# Altium PCB BSPD_PCB.PcbDoc
Units mil, origin at the board's own origin, x right, y up, seen from the top; angles counter-clockwise.
Board outline 2163.98 x 1652.88 mil, 2 copper layers (Top Layer, Bottom Layer); 45 components, 32 nets, 147 pads, 82 vias.
Unrouted connection lines stored in the file: 4.
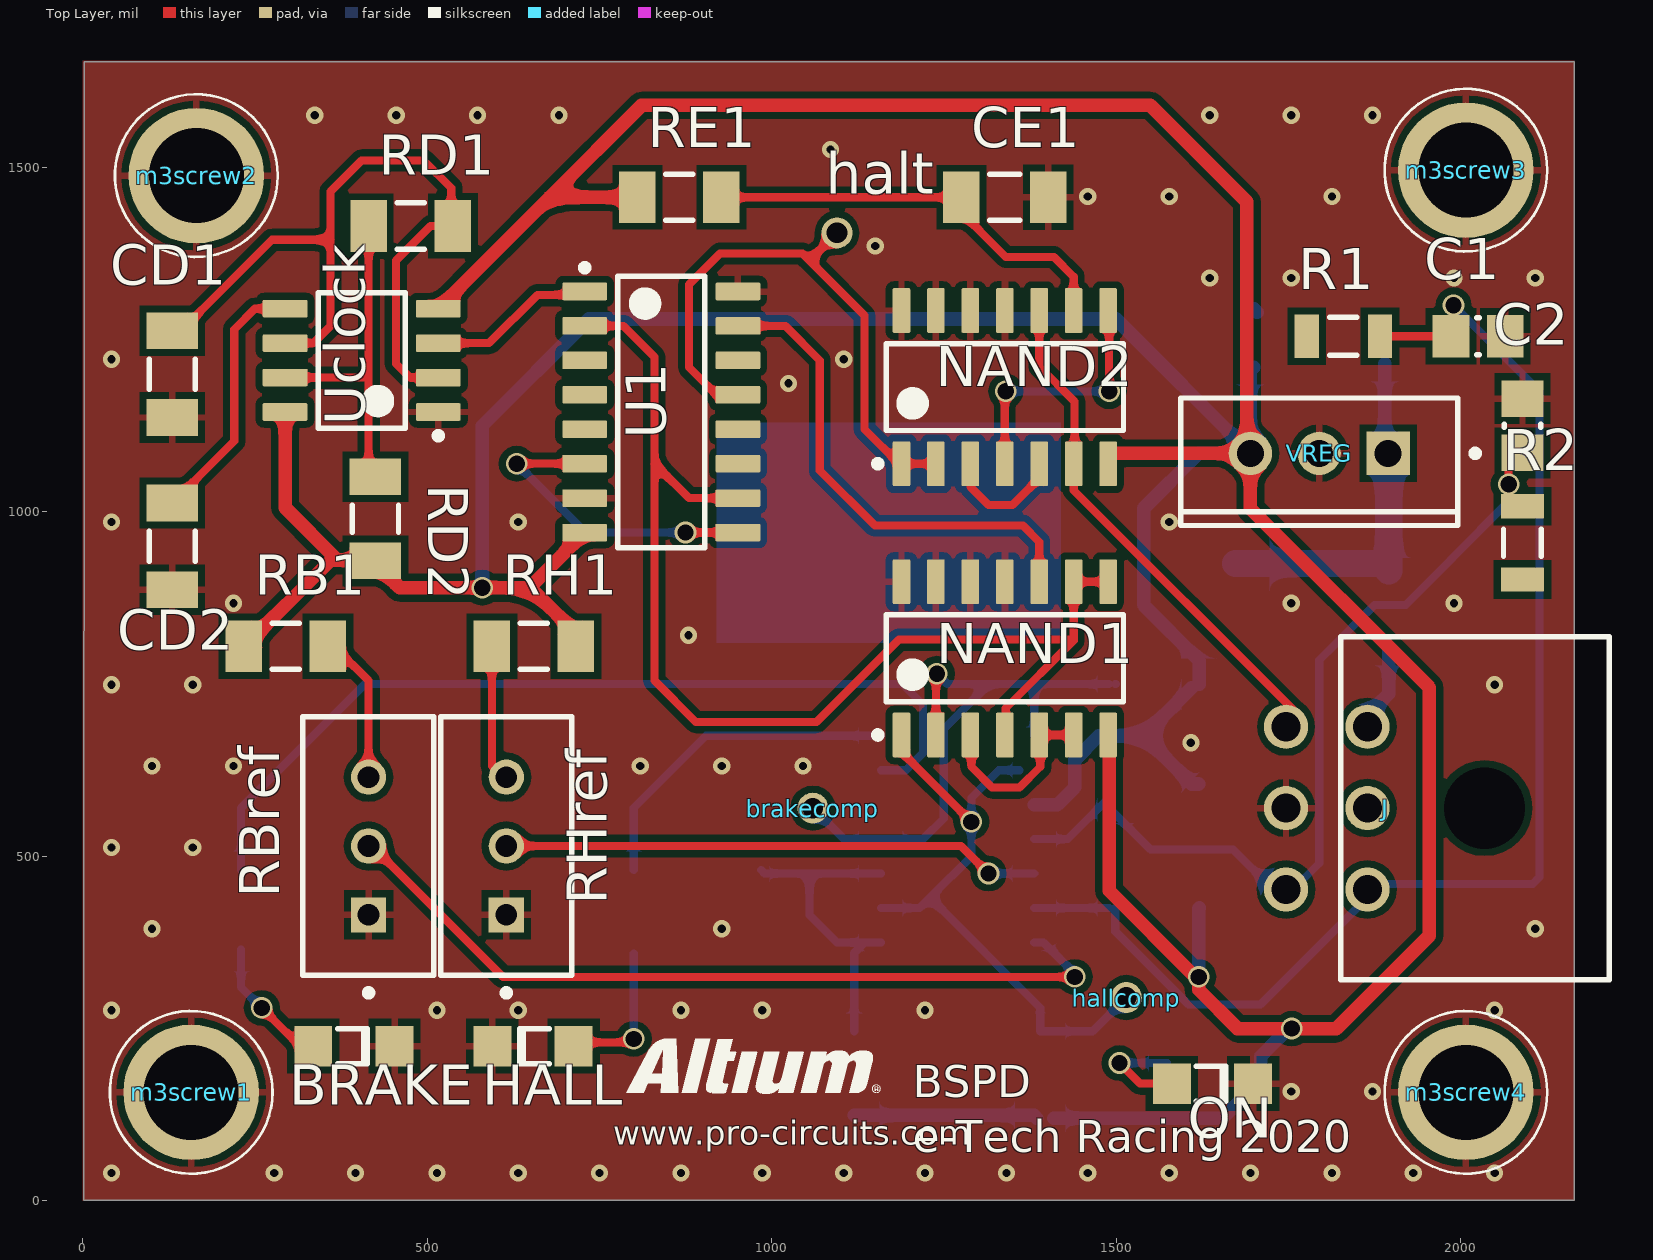
[diagram p0: Top Layer view]
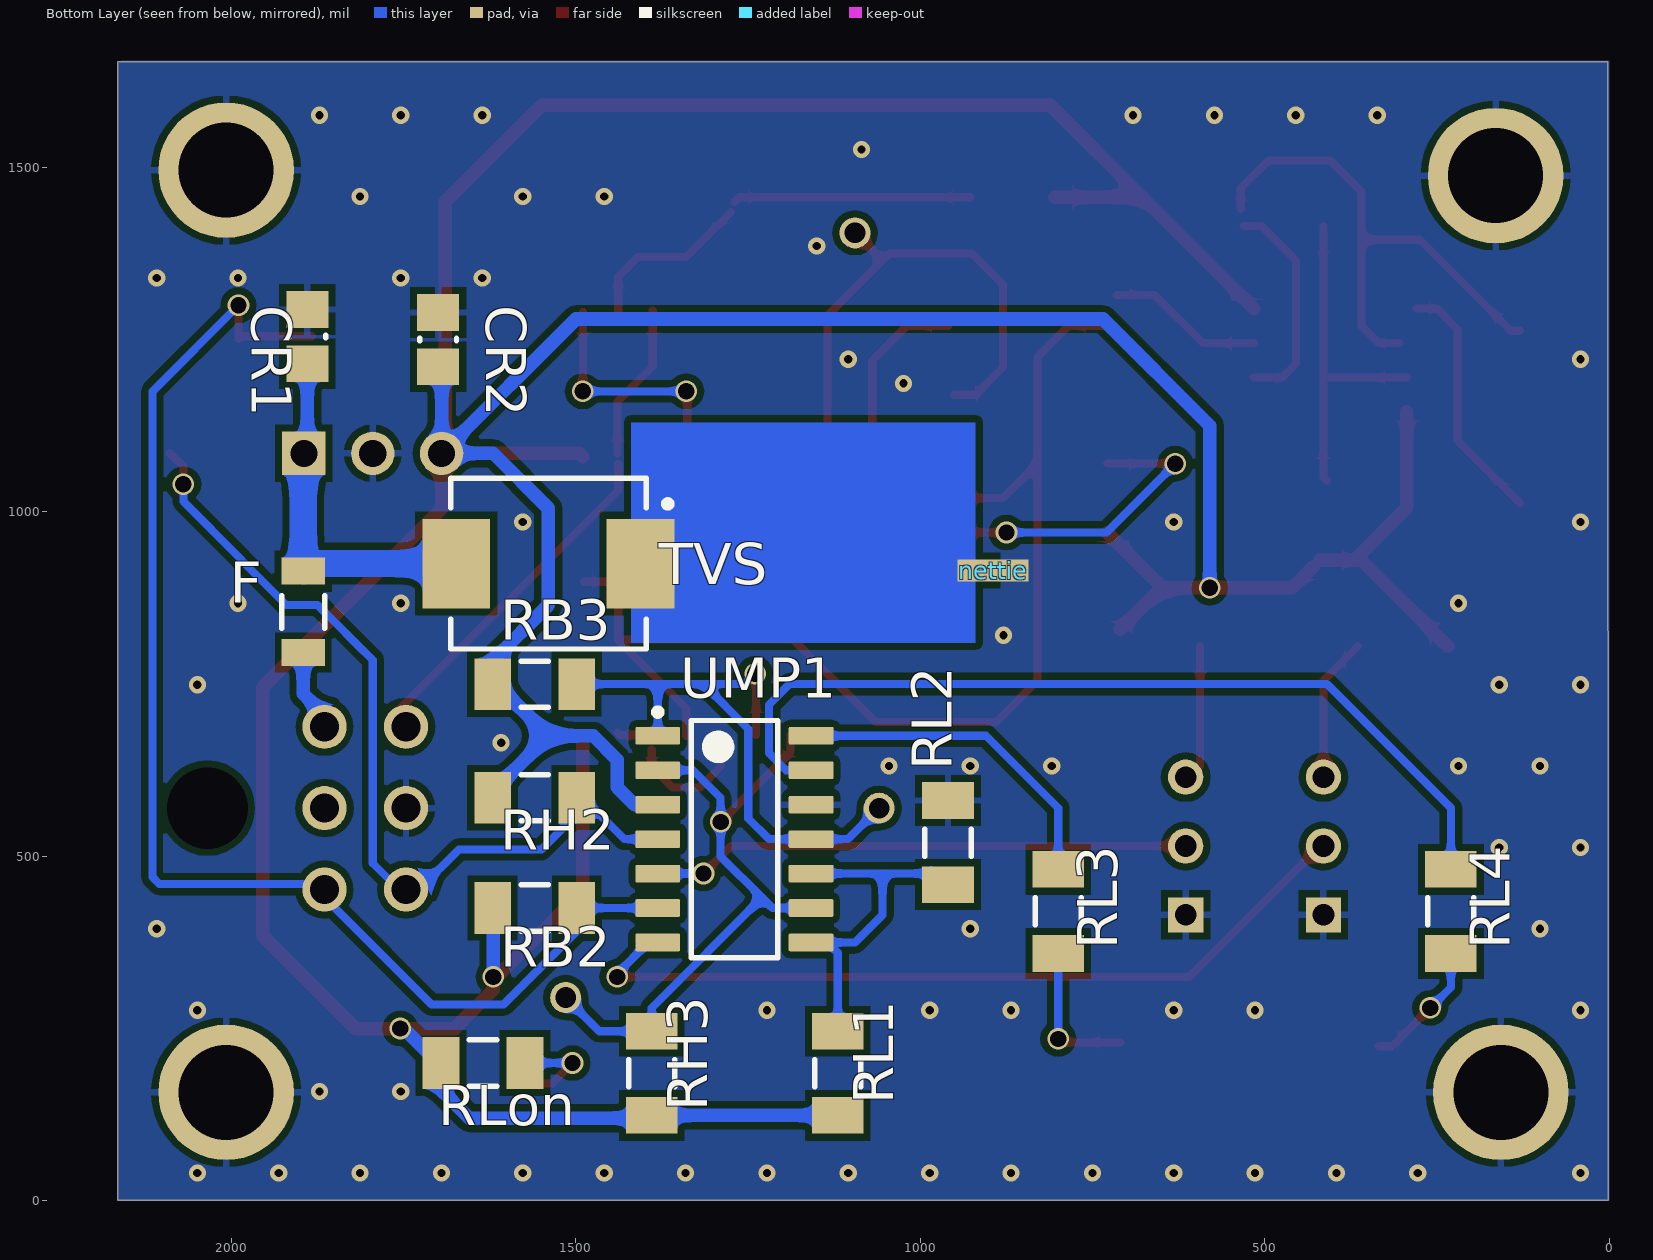
[diagram p1: Bottom Layer view, seen from below]

## Layer stack, top to bottom
Top Solder: solder mask 0.4, Solder Resist, Dk 3.5
Top Layer: signal copper 1.4
Dielectric 1: dielectric 12.6, FR-4, Dk 4.8
Bottom Layer: signal copper 1.4
Bottom Solder: solder mask 0.4, Solder Resist, Dk 3.5

## Board outline
1.38,0.66 2165.35,0.66 2165.35,1653.54 2.64,1653.54

## Design rules (kind name [scope] priority, off if disabled: settings)
Clearance [All] p1: gap=10 ignorepadtopadclearanceinfootprint=FALSE except(0: Arc-Hole Track-Hole SMDPad-Hole THPad-Hole Via-Hole Fill-Hole Poly-Hole Region-Hole Text-Hole)
HoleSize [All] p1: absolutevalues=TRUE maxlimit=393.7 minlimit=1 maxpercent=80.000 minpercent=20.000
PolygonConnect "Net ties" [All vs InComponent('nettie')] p1: connectstyle=Direct reliefconductorwidth=10 reliefentries=4 polygonreliefangle="90 Angle" airgapwidth=10
PolygonConnect Stitchings [All vs InNamedUnion('Via Stitchings')] p2: connectstyle=Direct reliefconductorwidth=10 reliefentries=4 polygonreliefangle="90 Angle" airgapwidth=10
PolygonConnect pads [All vs isPad] p3: connectstyle=Relief reliefconductorwidth=10 reliefentries=4 polygonreliefangle="90 Angle" airgapwidth=10
RoutingVias [All] p1: holewidth=23.62 width=31.5 viastyle="Through Hole" minholewidth=23.62 minwidth=31.5 maxholewidth=23.62 maxwidth=31.5
SolderMaskExpansion [All] p1: expansion=4 istentingtop=FALSE
Width Width_power [InNetClass('power')] p1: maxlimit=39.37 minlimit=19.68 preferedwidth=19.68
Width Width_GND [InNetClass('gnd')] p2: maxlimit=39.37 minlimit=11.81 preferedwidth=19.68
Width [All] p3: maxlimit=39.37 minlimit=11.81 preferedwidth=11.81
29 further rules are at their usual default settings.

## Classes and differential pairs
component class Timing: CD1 CD2 NAND1 RD1 RD2 U1 Uclock
component class BSPD_Main: brakecomp C1 C2 CR1 CR2 F hallcomp halt J m3screw1 m3screw2 m3screw3 m3screw4 nettie ON R1 R2 RLon TVS VREG
component class Latching: CE1 NAND2 RE1
net class power: +12 GND LVBat NetCR1_2
component class Input: BRAKE HALL RB1 RB2 RB3 RBref RH1 RH2 RH3 RHref RL1 RL2 RL3 RL4 UMP1

## Components (designator, comment, footprint, x,y, rotation, side; value= is the part's Value field where it differs from the comment)
BRAKE "150120BS75000" 1206_A 393.74,224.37 r180 top
brakecomp "testpoint" testpoint 1060,570 r90 top
C1 "100nF" CAPC0805(2012)145_M 2025.63,1255 r0 top
C2 "100nF" CAPC0805(2012)145_M 2090,1125 r270 top
CD1 "CAP 68nF" CAPC1206(3216)100_M 130,1200 r270 top value=68nF
CD2 "CAP 10nF" CAPC1206(3216)110_M 130,950 r270 top value=2.7uF
CE1 "CAP 1uF" CAPC1206(3216)190_M 1338.58,1456.69 r180 top value=1uF
CR1 "CAP 470nF" CAPC0805(2012)110_M 1890,1254.37 r270 bottom value=470nF
CR2 "CAP 100nF" CAPC0805(2012)145_M 1700,1250 r270 bottom value=100nF
F "NANOSMDC012F-2" TECO-NANOSMDC012F_V 1896,855 r90 bottom
HALL "150120BS75000" 1206_A 653.74,224.37 r0 top
hallcomp "testpoint" testpoint 1515,295 r90 top
halt "testpoint" testpoint 1095,1405 r90 top
J "Molex Micro-Fit 3x2 Right Angle" "Molex Micro-fit 3x2 Right angle" 1935.24,667.95 r90 top
m3screw1 "m3 screw" "M3 screw" 157.48,157.48 r90 top
m3screw2 "m3 screw" "M3 screw" 165,1488.15 r90 top
m3screw3 "m3 screw" "M3 screw" 2007.87,1496.06 r90 top
m3screw4 "m3 screw" "M3 screw" 2007.87,157.48 r90 top
NAND1 "CD4011BM" D0014A_M 1338.58,787.4 r90 top
NAND2 "CD4011BM" D0014A_M 1338.58,1181.1 r90 top
nettie "NETTIE" NETTIE-SMT2-W0.8L2.0(MM) 884.92,914.76 r180 bottom net-tie
ON "150120RS75000" 1206_A 1640,170 r180 top
R1 "30k" RESC3216X60X45LL10T20 1830,1255 r0 top
R2 "30k" RESC3216X60X45LL10T20 2090,955 r90 top
RB1 "1K1" RESC1206(3216)_M 295,805 r180 top value="1100.00 Ohm"
RB2 "10K" RESC1206(3216)_M 1560,425 r0 bottom value="10000.00 Ohm"
RB3 "10K" RESC1206(3216)_M 1560,750 r0 bottom value="10000.00 Ohm"
RBref "POT Bourns 3296W 10K" "POT Bourns 3296W" 440,525 r90 top
RD1 "68K" RESC1206(3216)_M 476.18,1415 r180 top value="68000.00 Ohm"
RD2 "1K1" RESC1206(3216)_M 425,990 r270 top value="1100.00 Ohm"
RE1 "10K" RESC1206(3216)_M 866.14,1456.69 r180 top value="10000.00 Ohm"
RH1 "68K" RESC1206(3216)_M 655,805 r0 top value="68000.00 Ohm"
RH2 "10K" RESC1206(3216)_M 1560,585 r0 bottom value="10000.00 Ohm"
RH3 "10K" RESC1206(3216)_M 1390,185 r270 bottom value="10000.00 Ohm"
RHref "POT Bourns 3296W 100K" "POT Bourns 3296W" 640,525 r90 top
RL1 "10K" RESC1206(3216)_M 1120,185 r270 bottom value="10000.00 Ohm"
RL2 "10K" RESC1206(3216)_M 960,520 r270 bottom value="10000.00 Ohm"
RL3 "1K1" RESC1206(3216)_M 800,420 r270 bottom value="1100.00 Ohm"
RL4 "1K1" RESC1206(3216)_M 230,420 r270 bottom value="1100.00 Ohm"
RLon "1K1" RESC1206(3216)_M 1635,200 r0 bottom value="1100.00 Ohm"
TVS "TVS 40V" "TVS  DO-214AB" 1540,925 r180 bottom (schematic designator tvs)
U1 "CD4520BM" D0016A_M 840,1145 r0 top
Uclock "LMC555CM/NOPB" D0008A_M 405,1220 r180 top
UMP1 "LM339M" D0014A_M 1270,525 r180 bottom
VREG "LM7812" FAIR-TO-220-3 1795,1085 r270 top

## Footprints (in the part's own frame and the unit in brackets; to place one, negate y for a bottom-side part, rotate by r counter-clockwise, add the part's x,y. Pads: shape width x height; smd on the part's side, far side on the other; paste and mask are expansions set on the pad)
1206_A [mm] "Chip LED, 2-Leads, Body 3.2x1.6mm, IPC Medium Density"
  rect 1.4x1.5 smd: 1(-1.5,0) 2(1.5,0)
  silkscreen extent -0.5,-0.67 0.6,0.65, body extent -1.6,-0.8 1.6,0.8, height 0.68
CAPC0805(2012)110_M [mm] "Chip Capacitor, Body 2.0x1.2mm, Height 1.1mm, IPC Low Density"
  rect 1.35x1.55 smd: 1(-1,0) 2(1,0)
  silkscreen extent -0.05,-0.67 0.05,0.67, body extent -1.1,-0.72 1.1,0.72, height 1.1
CAPC0805(2012)145_M [mm] "Chip Capacitor, Body 2.0x1.2mm, Height 1.45mm, IPC Low Density"
  rect 1.35x1.55 smd: 1(-1,0) 2(1,0)
  silkscreen extent -0.05,-0.67 0.05,0.67, body extent -1.1,-0.72 1.1,0.72, height 1.45
CAPC1206(3216)100_M [mm] "Chip Capacitor, Body 3.2x1.6mm, Height 1mm, IPC Low Density"
  rect 1.35x1.9 smd: 1(-1.6,0) 2(1.6,0)
  silkscreen extent -0.55,-0.85 0.55,0.85, body extent -1.7,-0.9 1.7,0.9, height 1
CAPC1206(3216)110_M [mm] "Chip Capacitor, Body 3.2x1.6mm, Height 1.1mm, IPC Low Density"
  rect 1.35x1.9 smd: 1(-1.6,0) 2(1.6,0)
  silkscreen extent -0.55,-0.85 0.55,0.85, body extent -1.7,-0.9 1.7,0.9, height 1.1
CAPC1206(3216)190_M [mm] "Chip Capacitor, Body 3.2x1.6mm, Height 1.9mm, IPC Low Density"
  rect 1.35x1.9 smd: 1(-1.6,0) 2(1.6,0)
  silkscreen extent -0.55,-0.85 0.55,0.85, body extent -1.7,-0.9 1.7,0.9, height 1.9
D0008A_M [mm] "SOIC, 8-Leads, Body 5x4mm, Pitch 1.27mm, IPC Low Density"
  rrect15% 1.65x0.65 smd: 1(-2.825,1.905) 2(-2.825,0.635) 3(-2.825,-0.635) 4(-2.825,-1.905) 5(2.825,-1.905) 6(2.825,-0.635) 7(2.825,0.635) 8(2.825,1.905)
  silkscreen extent -2.95,-2.5 1.6,2.9, body extent -3,-2.45 3,2.45, height 1.63
D0014A_M [mm] "SOIC, 14-Leads, Body 8.75x4mm, Pitch 1.27mm, IPC Low Density"
  rrect15% 1.65x0.65 smd: 1(-2.825,3.81) 2(-2.825,2.54) 3(-2.825,1.27) 4(-2.825,0) 5(-2.825,-1.27) 6(-2.825,-2.54) 7(-2.825,-3.81) 8(2.825,-3.81) 9(2.825,-2.54) 10(2.825,-1.27) 11(2.825,0) 12(2.825,1.27) 13(2.825,2.54) 14(2.825,3.81)
  silkscreen extent -2.95,-4.38 1.6,4.81, body extent -3.02,-4.32 3.02,4.32, height 1.59
D0016A_M [mm] "SOIC, 16-Leads, Body 10x4mm, Pitch 1.27mm, IPC Low Density"
  rrect15% 1.65x0.65 smd: 1(-2.825,4.445) 2(-2.825,3.175) 3(-2.825,1.905) 4(-2.825,0.635) 5(-2.825,-0.635) 6(-2.825,-1.905) 7(-2.825,-3.175) 8(-2.825,-4.445) 9(2.825,-4.445) 10(2.825,-3.175) 11(2.825,-1.905) 12(2.825,-0.635) 13(2.825,0.635) 14(2.825,1.905) 15(2.825,3.175) 16(2.825,4.445)
  silkscreen extent -2.95,-5 1.6,5.44, body extent -3,-4.95 3,4.95, height 1.59
FAIR-TO-220-3 [mm] "FM, 3-Leads, Body 10.2x4.7mm, Pitch 2.54mm"
  rect 1.6x1.6 hole 1: 1(0,2.54)
  round 1.6 hole 1: 2(0,0) 3(0,-2.54)
  silkscreen extent -2.04,-5.1 2.66,5.88, body extent -2.04,-5.1 2.66,5.1, height 18.95
"M3 screw" [mm]
  round 5 hole 3.5: pad(0,0)
  silkscreen extent -3,-3 3,3, body extent -2.75,-2.71 2.75,2.79, height 3
"Molex Micro-fit 3x2 Right angle" [mm]
  round 1.63 hole 1.07: 1(0.512,1.786) 2(-2.488,1.786) 3(-5.488,1.786) 4(0.512,4.786) 5(-2.488,4.786) 6(-5.488,4.786)
  round 0 hole 3: 7(-2.488,-2.534)
  silkscreen extent -8.81,-7.13 3.84,2.78, body extent -9.07,-7.12 4.08,5.12, height 8.78
NETTIE-SMT2-W0.8L2.0(MM) [mil] "Net-Tie, Surface Mount, 2.0mm x 0.8mm, 2 Pads(1.2mm x 0.8mm)"
  rect 52x31.5 smd paste-52 mask-19.68: 1(-35.08,0.24) 2(16.1,0.24)
"POT Bourns 3296W" [mm]
  rect 1.3x1.3 hole 0.8: 1(-2.794,0.635)
  round 1.3 hole 0.8: 2(-0.254,0.635) 3(2.286,0.635)
  silkscreen extent -5.79,-1.77 4.51,3.06, body extent -5.02,-1.77 4.51,3.06, height 11.55
RESC1206(3216)_M [mm] "Chip Resistor, Body 3.2x1.6mm, IPC Low Density"
  rect 1.35x1.9 smd: 1(-1.55,0) 2(1.55,0)
  silkscreen extent -0.5,-0.85 0.5,0.85, body extent -1.67,-0.87 1.67,0.87, height 0.75
RESC3216X60X45LL10T20 [mm] "Chip Resistor, 2-Leads, Body 3.20x1.60mm, IPC High Density"
  rect 0.9x1.6 smd: 1(-1.35,0) 2(1.35,0)
  silkscreen extent -0.5,-0.7 0.5,0.7, body extent -1.65,-0.85 1.65,0.85, height 0.6
TECO-NANOSMDC012F_V [mm] "SMD, 2-Leads, Body 3.2x1.585mm"
  rect 1x1.6 smd: 1(-1.5,0) 2(1.5,0)
  silkscreen extent -0.6,-0.79 0.6,0.79, body extent -1.6,-0.79 1.6,0.79, height 1
testpoint [mil]
  round 45 hole 30: 1(0,0)
"TVS  DO-214AB" [mm] "Molded Diode, 2-Leads, Body 7.11x6.22mm"
  rect 2.5x3.3 smd: 1(-3.4,0) 2(3.4,0)
  silkscreen extent -3.6,-3.15 4.52,3.15, body extent -3.77,-3.11 3.77,3.11, height 2.5

## Part data
BRAKE: library part CMP-1426-00014-1, "SMD mono-color Chip LED, WL-SMCW, Green", Color=Green, Manufacturer="Wuerth Elektronik", PartNumber=150120GS75000, ComponentLink1Description="Manufacturer URL", ComponentLink1URL=http://www.we-online.com, ComponentLink2Description=Datasheet, ComponentLink2URL=http://katalog.we-online.com/led/datasheet/150120GS75000.pdf, PackageReference=1206_A
C1 C2 CR2: library part CMP-1036-04417-1, "CAP 100nF 50V ±5% 0805 (2012 Metric) Thickness 1.45mm SMD", Case-EIA=0805, Case-Metric=2012, Rated Voltage="50 V", Tolerance=Â±5%, Max Thickness="1.45 mm", Technology=SMT
CD1: library part CMP-1037-04097-1, "CAP 68nF 50V -20% to +80% 1206 (3216 Metric) Thickness 1mm SMD", Case-EIA=1206, Case-Metric=3216, Rated Voltage="50 V", Tolerance="-20% to +80%", Max Thickness="1 mm", Technology=SMT
CD2: library part CMP-1037-04841-1, "CAP 2.7uF 10V ±10% 1206 (3216 Metric) Thickness 1.05mm SMD", Case-EIA=1206, Case-Metric=3216, Rated Voltage="10 V", Tolerance=Â±10%, Max Thickness="1.05 mm", Technology=SMT
CE1: library part CMP-1037-04720-1, "CAP 1uF 50V ±10% 1206 (3216 Metric) Thickness 1.9mm SMD", Case-EIA=1206, Case-Metric=3216, Rated Voltage="50 V", Tolerance=Â±10%, Max Thickness="1.9 mm", Technology=SMT
CR1: library part CMP-1036-04655-1, "CAP 470nF 50V ±20% 0805 (2012 Metric) Thickness 1.1mm SMD", Case-EIA=0805, Case-Metric=2012, Rated Voltage="50 V", Tolerance=Â±20%, Max Thickness="1.1 mm", Technology=SMT
F: library part CMP-2000-06803-1, "PolySwitch Resettable Device, 0.12 A, 48 V, -40 to 85 degC, 2-Pin SMD, RoHS, Tape and Reel", Hold Current=0.12A, Manufacturer=TEConnectivity/CircuitProtection, Maximum Current Rating=10A, Maximum Initial Resistance=N/A, Maximum Post Trip Resistance=6.5Ohm, Maximum Voltage Rating=48VDC, Minimum Initial Resistance=1.4Ohm, Operating Temperature=-40to85C, Package/Case=1206, Package Description="2-Pin Surface Mount Device, Body 3.2 x 1.585 mm", Package Reference=NANOSMDC012F, Trip Current=0.39A, Typical Power Dissipation=0.5(Max)W, Agency Approvals=CSA/TUV/UL, Applications=N/A, Datasheet URL=http://www.te.com/commerce/DocumentDelivery/DDEController?Action=srchrtrv&DocNm=CLP00010&DocType=CS&DocLang=English, Datasheet Version=11/2013, Dimension=3.4(Max)x1.8(Max)x1(Max)mm, Family=nanoSMD, Lead Diameter=N/R, Manufacturer URL=http://www.te.com/, Maximum Trip Time=0.2@1As, Mounting=SurfaceMount, Mounting Technology=SurfaceMount, Number of Terminals=2, Packaging=TapeandReel, Part No=NANOSMDC012F-2, RoHS=Yes, Seated Plane Height=N/R, Terminal Pitch=N/R, Wire Form=N/R
HALL: library part CMP-1426-00013-1, "SMD mono-color Chip LED, WL-SMCW, Red", Color=Red, Manufacturer="Wuerth Elektronik", PartNumber=150120RS75000, ComponentLink1Description="Manufacturer URL", ComponentLink1URL=http://www.we-online.com, ComponentLink2Description=Datasheet, ComponentLink2URL=http://katalog.we-online.com/led/datasheet/150120RS75000.pdf, PackageReference=1206_A
J: "43045-0600", ComponentLink1Description=Molex, ComponentLink1URL=https://www.molex.com/molex/products/datasheet.jsp?part=active/0430450600_PCB_HEADERS.xml, ComponentLink2Description=Datasheet, ComponentLink2URL=https://www.molex.com/pdm_docs/sd/430450600_sd.pdf
NAND1: library part CMP-1627-00066-2, "CMOS Quad 2-Input NAND Gate, D0014A, TUBE", F @ Nom Voltage(Max)(Mhz)=8, Generic Part Number=CD4011B, ICC @ Nom Voltage(Max)(mA)=0.015, Manufacturer="Texas Instruments", Operating Temperature Range(C)="-55 to 125", Rating=Military, Voltage(Nom)(V)=10, Bits(#)=4, Code_JEDEC=MS-012, DatasheetVersion=SCHS021D, Input Type=CMOS, Output Drive (IOL/IOH)(Max)(mA)=1.5/-1.5, Output Type=CMOS, PackageReference=D0014A, Schmitt Trigger=No, Technology Family=CD4000, VCC(Max)(V)=18, VCC(Min)(V)=3
NAND2: library part CMP-1627-00066-2, "CMOS Quad 2-Input NAND Gate, D0014A, TUBE", F @ Nom Voltage(Max)(Mhz)=8, Generic Part Number=CD4011B, ICC @ Nom Voltage(Max)(mA)=0.015, Manufacturer="Texas Instruments", Operating Temperature Range(C)="-55 to 125", Rating=Military, Supplier Part Number 1=595-CD4011BM, Voltage(Nom)(V)=10, Bits(#)=4, Code_JEDEC=MS-012, DatasheetVersion=SCHS021D, Input Type=CMOS, Output Drive (IOL/IOH)(Max)(mA)=1.5/-1.5, Output Type=CMOS, PackageReference=D0014A, Schmitt Trigger=No, Supplier 1=Mouser, Technology Family=CD4000, VCC(Max)(V)=18, VCC(Min)(V)=3
nettie: library part CMP-0488-00002-1, "Net-Tie, Surface Mount, 2.0 mm x 0.8 mm, 2 Pads (1.2 mm x 0.8 mm)"
ON: library part CMP-1426-00013-1, "SMD mono-color Chip LED, WL-SMCW, Red", Color=Red, Manufacturer="Wuerth Elektronik", ComponentLink1Description="Manufacturer URL", ComponentLink1URL=http://www.we-online.com, ComponentLink2Description=Datasheet, ComponentLink2URL=http://katalog.we-online.com/led/datasheet/150120RS75000.pdf, PackageReference=1206_A, PartNumber=150120RS75000
R1: library part CMP-2003-02083-1, Manufacturer="Vishay Dale", Part Number=CRCW120630K0JNEA
R2: library part CMP-2003-02083-1, "CRCW120630K0JNEA", Manufacturer="Vishay Dale", Part Number=CRCW120630K0JNEA
RB1 RD2 RL3 RL4 RLon: library part CMP-1014-00075-1, "1K1 0.25W 5% 1206 (3216 Metric)  SMD", Case-EIA=1206, Case-Metric=3216, Power="0.25 W", Tolerance="5 %", Technology=SMT
RB2 RB3 RE1 RH2 RH3 RL1 RL2: library part CMP-1014-00098-1, "10K 0.25W 5% 1206 (3216 Metric)  SMD", Case-EIA=1206, Case-Metric=3216, Power="0.25 W", Tolerance="5 %", Technology=SMT
RD1 RH1: library part CMP-1014-00118-1, "68K 0.25W 5% 1206 (3216 Metric)  SMD", Case-EIA=1206, Case-Metric=3216, Power="0.25 W", Tolerance="5 %", Technology=SMT
TVS: "WURTH ELEKTRONIK         824551401             TVS Diode, WE-TVSP Series, Bidirectional, 40 V, 64.5 V, DO-214AB, 2 Pins", Clamping Voltage=64.5V, Manufacturer="Wurth Electronics", Manufacturer Part Number=824551401, Max Breakdown Voltage=46.75V, Max Operating Temperature=150°C, Min Operating Temperature=-65°C, Peak Pulse Current=46.5A, Peak Pulse Power=3kW, Power Line Protection=No, Reverse Standoff Voltage=40V, Composition=Zener, Min Breakdown Voltage=46.75V, Mount="Surface Mount", Number of Bidirectional Channels=1, Number of Pins=2, Packaging="Cut Tape", Polarity=Bidirectional, REACH SVHC=Unknown, Supplier 1="Wurth Patro", Supplier Part Number 1=824551401
U1: library part CMP-1623-00148-2, "CMOS Dual Binary Up-Counter, D0016A, TUBE", F @ Nom Voltage(Max)(Mhz)=8, Generic Part Number=CD4520B, ICC @ Nom Voltage(Max)(mA)=0.03, Manufacturer="Texas Instruments", Operating Temperature Range(C)="-55 to 125", Rating=Catalog, tpd @ Nom Voltage(Max)(ns)=230, Voltage(Nom)(V)=5,10,15, Bits(#)=4, Code_JEDEC="MS-012 variation AC", DatasheetVersion=SCHS076D, Function=Counter, Inputs=1, Input Type=CMOS, Output Drive (IOL/IOH)(Max)(mA)=1.5/-1.5, Output Type=CMOS, PackageReference=D0016A, Schmitt Trigger=No, Technology Family=CD4000, Type=Binary, VCC(Max)(V)=18, VCC(Min)(V)=3
Uclock: library part CMP-0056-00124-3, "CMOS Timer, 8-pin Narrow SOIC, Pb-Free", Manufacturer="Texas Instruments", PackageTopMarking=NSZXTT*LMC*555CM, PowerWise=N, Code_IPC=SOIC127P600-8, Code_JEDEC=MS-012-AA, ComponentLink1Description="Datasheet URL", ComponentLink1URL=http://www.ti.com/general/docs/lit/getliterature.tsp?genericPartNumber=LMC555&fileType=pdf, CompType="Analog IC", PackageDescription="SOIC Narrow, 4.9 x 3.9 x 1.45mm, 8 Lead, 1.27mm Pitch", PackageReference=D0008A, PinCount=8, RoHS=Y
UMP1: library part CMP-0055-00762-3, "Low Power Low Offset Voltage Quad Comparator, 14-pin Narrow SOIC", Manufacturer="Texas Instruments", Package Reference=D0014A, PackageTopMarking=NSUZXYTTE#*LM339M, PowerWise=N, Code_IPC=SOIC127P600-14, Code_JEDEC=MS-012AB, ComponentLink1Description="Datasheet URL", ComponentLink1URL=http://www.ti.com/general/docs/lit/getliterature.tsp?genericPartNumber=LM339-N&fileType=pdf, CompType=Amplifiers, PackageDescription="Molded Package S.O., .150in Wide, 14 Lead", PinCount=14, RoHS=N
VREG: library part CMP-2000-04938-1, "Positive Voltage Regulator, 5 V, 1 A, -40 to 125 degC, 3-Pin TO-220, RoHS, Tube", Manufacturer=FairchildSemiconductor, Maximum Input Voltage=35V, Maximum Output Current=2.2(Typ)A, Maximum Quiescent Current=8mA, Operating Temperature=-40to125degC, Output Voltage=5V, Package=3TO-220AB, Package Description="3-Pin Through Hole Device, Body 10 x 4.5 mm, Pitch 2.54 mm", Package Reference=TO-220, Typical Dropout Voltage @ Current=2@1AV, Accuracy=±4%, Category=LinearRegulator, Datasheet URL=https://datasheet.ciiva.com/26904/lm7805ct-26904988.pdf, Datasheet Version=Aug-12, Line Regulation=100mV, Load Regulation=100mV, Manufacturer URL=https://www.fairchildsemi.com/, Mounting=ThroughHole, Number of Outputs=1, Output Type=Fixed, Package URL=https://www.fairchildsemi.com/package-drawings/TO/TO220B03.pdf, Packaging=Rail/Tube, Polarity=Positive, Rad Hard=No, Type=Linear
RBref: ComponentLink1Description="RS Components", ComponentLink1URL=https://es.rs-online.com/web/p/resistencias-variables/5219647/, ComponentLink2Description=Datasheet, ComponentLink2URL=https://docs-emea.rs-online.com/webdocs/069c/0900766b8069ccf4.pdf
RHref: ComponentLink1Description="RS Components", ComponentLink1URL=https://es.rs-online.com/web/p/resistencias-variables/5219653/, ComponentLink2Description=Datasheet, ComponentLink2URL=https://docs-emea.rs-online.com/webdocs/069c/0900766b8069ccf4.pdf

## Via types
v1: diameter 25, hole 12, Top Layer to Bottom Layer, 66 vias
v2: diameter 31.5, hole 23.62, Top Layer to Bottom Layer, 16 vias

## Nets (pads, with @x,y where several pads share a name; then routed paths per layer and width w, separated by ;. In a path a pad name is that pad's centre, name@x,y a point inside that pad or via, vN(x,y) a via of type N, cw(c..) or ccw(c..) an arc to the next point about the centre after c; other vN are vias at no path point)
+12: CR2.2 NAND1.7 NAND2.14 RB1.2 RB2.2 RB3.2 RD2.2 RE1.2 RH1.2 RH2.2 RH3.2 RL1.2 RLon.2 U1.8 Uclock.4 Uclock.8 UMP1.3 VREG.3 | length 7926.8
  Top Layer w19.68: RB1.2 235,805 360,930 370,930 ; Uclock.8 293.78,1006.22 370,930 ; RD2.2@420,930 370,930 ; RD2.2@430,920 460,890 v2(580,890) 650,890 ; Uclock.4 677.91,1456.69 ; RH1.2@710,830 650,890 ; U1.8 650,891.22 650,890 ; RE1.2 677.91,1456.69 ; NAND1.7@1490,670 1490,450 1615,325 v2(1620,325) 1620,306.23 1676.23,250 v2(1755,250) 1820,250 1955,385 1955,745 1695,1005 VREG.3 VREG.3@1690,1085 ; 1490,1080 1495,1085 VREG.3@1690,1085 ; VREG.3@1690,1080 VREG.3@1690,1085 ; 677.91,1456.69 811.22,1590 1550,1590 1690,1450 VREG.3@1690,1085
  Bottom Layer w19.68: v2(580,890) 580,1125 735,1280 1500,1280 VREG.3 ; RL1.2 1381.02,123.98 RH3.2@1385,120 ; UMP1.3 1415,575 1440,600 1440,640 1475,675 1540,675 ; RH3.2@1410,120 1655,120 1710,175 RLon.2@1710,205 ; RB3.2@1610,745 1540,675 ; v2(1620,325) 1620,423.98 RB2.2 ; RH2.2@1620,605 1610,605 1540,675 ; RB3.2 1621.02,783.98 1540,865 1540,1005 1620,1085 VREG.3 ; CR2.2@1700,1210 1695,1205 VREG.3 ; RLon.2@1710,210 1750,250 v2(1755,250)
brakecomp: brakecomp.1 NAND1.2 RB3.1 UMP1.1 UMP1.11 | length 864.6
  Top Layer w11.81: NAND1.2 1238.58,763.58 v2(1240,765)
  Bottom Layer w11.81: brakecomp.1 1105,525 UMP1.11 1220,525 1250,555 1250,685 1315,750 ; v2(1240,765) 1255,750 1315,750 ; UMP1.1 1381.22,750 ; RB3.1@1490,750 1381.22,750 ; RB3.1 RB3.1@1500,750 ; 1315,750 1381.22,750
brakeIN: C1.1 J.3 R1.1 R1.2 RB2.1 UMP1.6 | length 1920.3
  Top Layer w11.81: R1.2 C1.1@1985,1255 ; C1.1 1990,1251.26 v2(1990,1300)
  Bottom Layer w11.81: UMP1.6 RB2.1@1490,425 ; RB2.1 1498.98,391.02 1605,285 1710,285 1858.82,433.82 J.3@1858.82,450 ; J.3@1865,450 1875,460 2105,460 2115,470 2115,1175 v2(1990,1300)
clk: U1.1 Uclock.3 | length 227.8
  Top Layer w11.81: Uclock.3 590,1245 660,1315 U1.1@715,1315
GND: BRAKE.1 C1.2 C2.1 CD1.2 CD2.2 CE1.1 CR1.1 CR2.1 HALL.1 J.5 m3screw1.pad m3screw2.pad m3screw3.pad m3screw4.pad NAND1.11 NAND1.12 NAND1.13 NAND1.14 NAND2.7 NAND2.12 NAND2.13 nettie.2 ON.1 RBref.1 RHref.1 RL2.1 U1.7 U1.16 Uclock.1 UMP1.12 VREG.2 | length 7.1
  Bottom Layer w19.68: CR2.1@1700,1295 CR2.1@1705,1290
  other v1: 41.73,40.47 277.95,40.47 396.06,40.47 514.17,40.47 632.28,40.47 750.39,40.47 868.5,40.47 986.61,40.47 1104.72,40.47 1222.83,40.47 1340.94,40.47 1459.05,40.47 1577.16,40.47 1695.27,40.47 1813.38,40.47 1931.5,40.47 2049.61,40.47 1754.33,158.58 1872.44,158.58 41.73,276.69 514.17,276.69 632.28,276.69 868.5,276.69 986.61,276.69 1222.83,276.69 2049.61,276.69 100.79,394.8 927.56,394.8 2108.66,394.8 41.73,512.91 159.84,512.91 100.79,631.02 218.9,631.02 809.45,631.02 927.56,631.02 1045.67,631.02 1608.66,664.8 41.73,749.13 159.84,749.13 2049.61,749.13 879.45,821.02 218.9,867.24 1754.33,867.24 1990.55,867.24 41.73,985.35 632.28,985.35 1577.16,985.35 1024.72,1186.57 41.73,1221.57 1104.72,1221.57 1636.22,1339.68 1754.33,1339.68 1990.55,1339.68 2108.66,1339.68 1150.67,1386.02 1459.05,1457.79 1577.16,1457.79 1813.38,1457.79 1085.67,1526.02 337.01,1575.9 455.12,1575.9 573.23,1575.9 691.34,1575.9 1636.22,1575.9 1754.33,1575.9 1872.44,1575.9
hallcomp: hallcomp.1 NAND1.1 RH3.1 UMP1.2 UMP1.9 | length 907.6
  Top Layer w11.81: NAND1.1 1188.58,651.42 v2(1290,550)
  Bottom Layer w11.81: UMP1.9 1215,425 1230,440 ; UMP1.2@1360,625 1330,625 1290,585 v2(1290,550) 1290,500 1230,440 ; hallcomp.1 1466.02,246.02 RH3.1 1390,280 1230,440
hallIN: C2.2 J.6 R2.1 R2.2 RH2.1 UMP1.4 | length 1229.7
  Top Layer w11.81: v2(2070,1040) 2070,1065.63 C2.2
  Bottom Layer w11.81: UMP1.4 1430,525 RH2.1@1485,580 ; RH2.1@1495,565 1550,510 1670,510 1726.77,453.23 J.6@1740.71,453.23 ; J.6@1745,450 1755,450 1795,490 1795,785 1819.09,809.1 1850.9,840.9 1875,865 1920.62,865 1986.69,931.07 1986.69,931.69 2070,1015 v2(2070,1040)
LVBat: F.1 J.1 | length 125
  Bottom Layer w19.68: J.1@1850,690 1896,736 F.1
NetBRAKE_2: BRAKE.2 RL4.2 | length 195.2
  Top Layer w11.81: v2(260,280) 315.63,224.37 BRAKE.2
  Bottom Layer w11.81: RL4.2@230,365 RL4.2 230,310 v2(260,280)
NetCD1_1: CD1.1 RD1.1 Uclock.2 Uclock.6 | length 1101.5
  Top Layer w11.81: CD1.1 142.99,1262.99 275,1395 360,1395 ; Uclock.6@305,1245 335,1245 360,1270 360,1395 ; Uclock.2 475,1195 455,1215 455,1365 505,1415 RD1.1@531.02,1415 ; RD1.1@535,1440 535,1470 495,1510 405,1510 360,1465 360,1395
NetCD2_1: CD2.1 Uclock.5 | length 361.7
  Top Layer w11.81: CD2.1 220,1102.99 220,1265 250,1295 Uclock.5@280,1295
NetCE1_2: CE1.2 NAND2.9 RE1.1 | length 597
  Top Layer w11.81: RE1.1 1263.31,1456.69 CE1.2@1270,1450 ; CE1.2@1275,1435 1340,1370 1410,1370 1438.58,1341.42 NAND2.9
NetCR1_2: CR1.2 F.2 TVS.1 VREG.1 | length 530.8
  Bottom Layer w19.68: F.2@1885,925 F.2@1890,920 ; VREG.1@1890,1080 VREG.1@1896,1074 ; CR1.2 1890,1085 VREG.1@1900,1075
  Bottom Layer w39.37: TVS.1 F.2@1885,925 ; F.2 VREG.1@1896,1074
NetHALL_2: HALL.2 RL3.2 | length 216
  Top Layer w11.81: HALL.2@710,230 795,230 v2(800,235)
  Bottom Layer w11.81: v2(800,235) RL3.2
Nethalt_1: halt.1 NAND2.1 NAND2.2 U1.13 | length 857.5
  Top Layer w11.81: U1.13 920,1170 880,1210 880,1330 925,1375 1045,1375 1055,1365 ; halt.1 1055,1365 ; NAND2.1@1185,1070 1135,1120 1135,1285 1055,1365 ; NAND2.1 1234.88,1069.88 NAND2.2@1235,1070
NetNAND1_3: NAND1.3 NAND1.5 NAND1.6 | length 249.6
  Top Layer w11.81: NAND1.3 1290,674.76 1290,630 1320,600 1360,600 1390,630 NAND1.5@1390,655 ; NAND1.5 1436.18,676.18 NAND1.6@1440,680
NetNAND1_10: NAND1.10 U1.15 | length 710
  Top Layer w11.81: U1.15@960,1270 1020,1270 1070,1220 1070,1060 1150,980 1365,980 1388.58,956.42 NAND1.10
NetNAND2_3: NAND2.3 NAND2.5 | length 169.5
  Top Layer w11.81: NAND2.3 1288.58,1036.42 1315,1010 1350,1010 NAND2.5@1395,1055
NetNAND2_4: NAND2.4 NAND2.8 | length 370.7
  Top Layer w11.81: NAND2.4 1338.58,1173.58 v2(1340,1175) ; v2(1490,1175) NAND2.8@1490,1290
  Bottom Layer w11.81: v2(1340,1175) v2(1490,1175)
NetON_2: ON.2 RLon.1 | length 146.4
  Top Layer w11.81: v2(1505,200) 1535,170 ON.2@1570,170
  Bottom Layer w11.81: v2(1505,200) RLon.1
NetRB1_1: RB1.1 RBref.3 | length 210.7
  Top Layer w11.81: RB1.1@365,805 415,755 RBref.3
NetRBref_2: RBref.2 UMP1.7 | length 1186.1
  Top Layer w11.81: RBref.2 420,515 610,325 v2(1440,325)
  Bottom Layer w11.81: UMP1.7 1395,375 1440,330 v2(1440,325)
NetRD1_2: RD1.2 RD2.1 Uclock.7 | length 493.4
  Top Layer w11.81: Uclock.7 415,1195 ; RD2.1@410,1045 415.16,1050.16 RD1.2
NetRH1_1: RH1.1 RHref.3 | length 203.7
  Top Layer w11.81: RH1.1 593.98,631.02 RHref.3@615,610
NetRHref_2: RHref.2 UMP1.5 | length 782.8
  Top Layer w11.81: RHref.2 1275,515 v2(1315,475)
  Bottom Layer w11.81: v2(1315,475) UMP1.5
NetRL1_1: RL1.1 RL2.2 UMP1.8 UMP1.10 | length 491.4
  Bottom Layer w11.81: RL2.2@985,480 990,475 1055,475 ; RL1.1 1120,360 UMP1.8@1135,375 ; UMP1.8 UMP1.8@1135,375 ; UMP1.10 1055,475 ; 1055,475 1055,415 1095,375 UMP1.8@1135,375
NetRL3_1: RL3.1 UMP1.14 | length 492.3
  Bottom Layer w11.81: RL3.1@800,480 RL3.1 800,570 905,675 UMP1.14
NetRL4_1: RL4.1 UMP1.13 | length 1304.6
  Bottom Layer w11.81: RL4.1@230,480 RL4.1 ; RL4.1@230,485 230,570 410,750 1190,750 1220,720 1220,650 1195,625 UMP1.13
NetU1_6: U1.6 U1.9 | length 461.4
  Top Layer w11.81: v2(630,1070) U1.6 ; v2(875,970) U1.9
  Bottom Layer w11.81: v2(630,1070) 730,970 v2(875,970)
relayOUT: J.4 NAND2.6 NAND2.10 | length 749.9
  Top Layer w11.81: NAND2.10 1388.58,1211.42 1440,1160 NAND2.6@1440,1085 ; NAND2.6 1438.58,1031.42 1760,710 J.4@1740,690
timingON: NAND1.4 NAND1.8 NAND1.9 U1.2 U1.10 | length 1713.7
  Top Layer w11.81: U1.2 785,1270 830,1225 830,1070 ; U1.10@940,1020 880,1020 830,1070 ; NAND1.4@1340,675 1340,715 1438.58,813.58 NAND1.9 ; 1435,815 1185,815 1065,695 890,695 830,755 830,1070 ; NAND1.9@1440,900 1441.38,898.62 NAND1.8
TVSsink: nettie.1 TVS.2
pads on no net: J.2 J.7 NAND2.11 U1.3 U1.4 U1.5 U1.11 U1.12 U1.14

## Polygon pours and split planes (outlines as drawn)
GND on Bottom Layer "Bottom Layer-GND" (solid, pour order 25): 0,0 0,1655 2160,1655 2165,1650 2165,0
GND on Top Layer "Top Layer-GND" (solid, pour order 23): 0,1655 0,0 2165,0 2165,1655

## Other copper
Bottom Layer:
  rectangle net TVSsink: 920,810 1420,1130

## Silkscreen, mask and mechanical layers (free items; w line width, h text height)
Top Overlay:
  drawing of 8 lines, arcs and shapes, not listed
  text "www.pro-circuits.com" at 770,70 h60
  text "BSPD / e-Tech Racing 2020" at 1205,55 h80